# Altium PCB Jade_v1_board.PcbDoc (part 1 of 2)
Units mm, origin at the board's own origin, x right, y up, seen from the top; angles counter-clockwise.
Board outline 20 x 55.5 mm, 4 copper layers (Top Layer, Layer 1, Layer 2, Bottom Layer), stack 0.547 mm thick; 95 components, 80 nets, 388 pads, 387 vias.
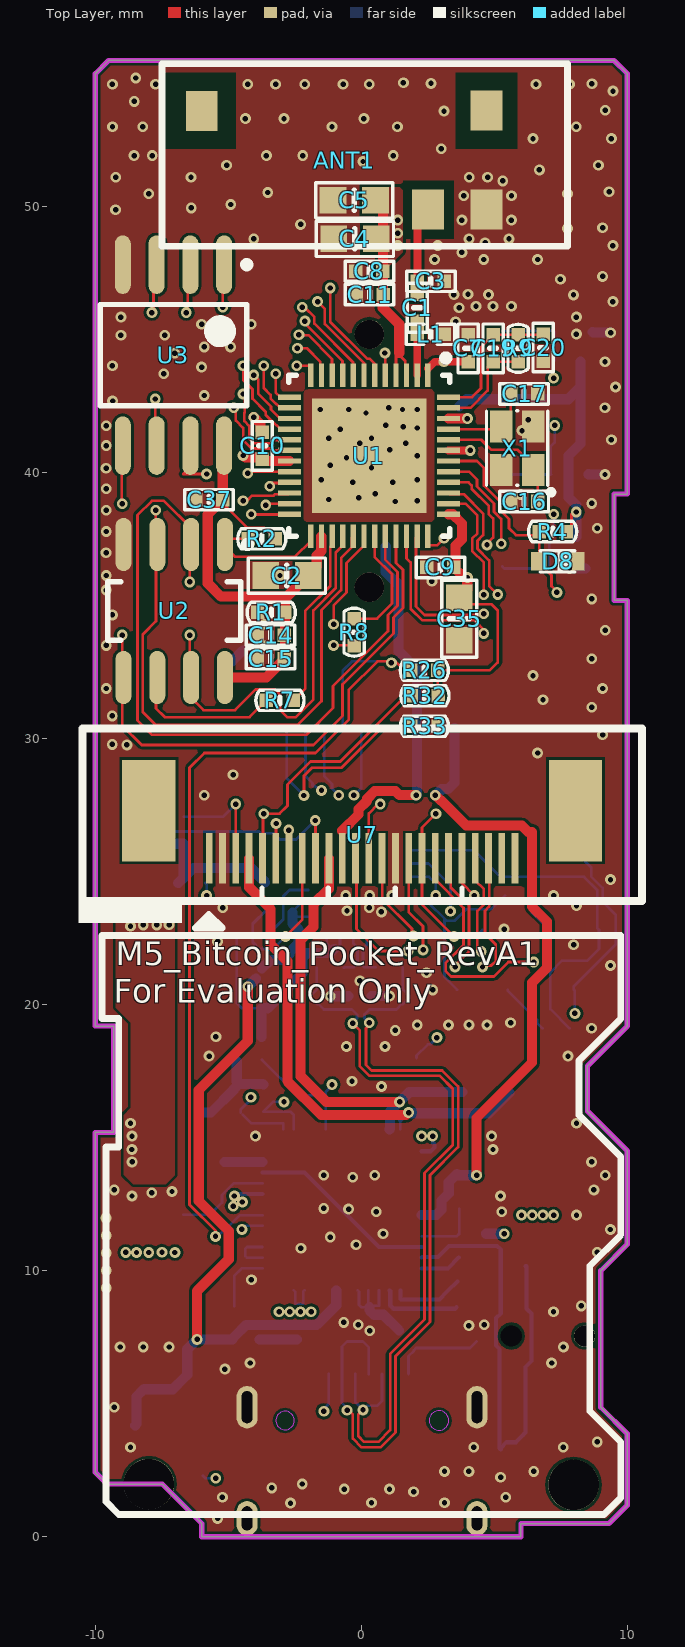
[diagram p0: Top Layer view]
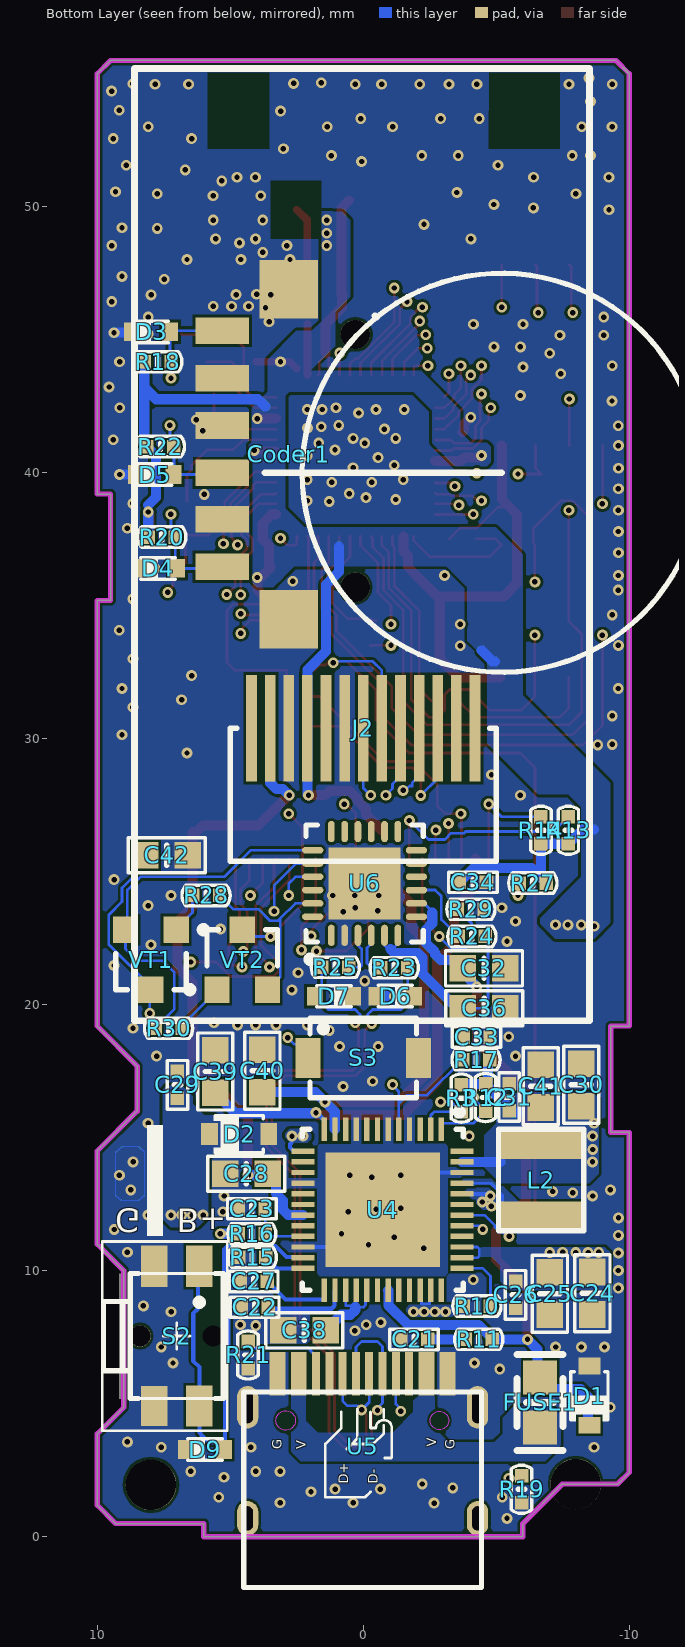
[diagram p1: Bottom Layer view, seen from below]
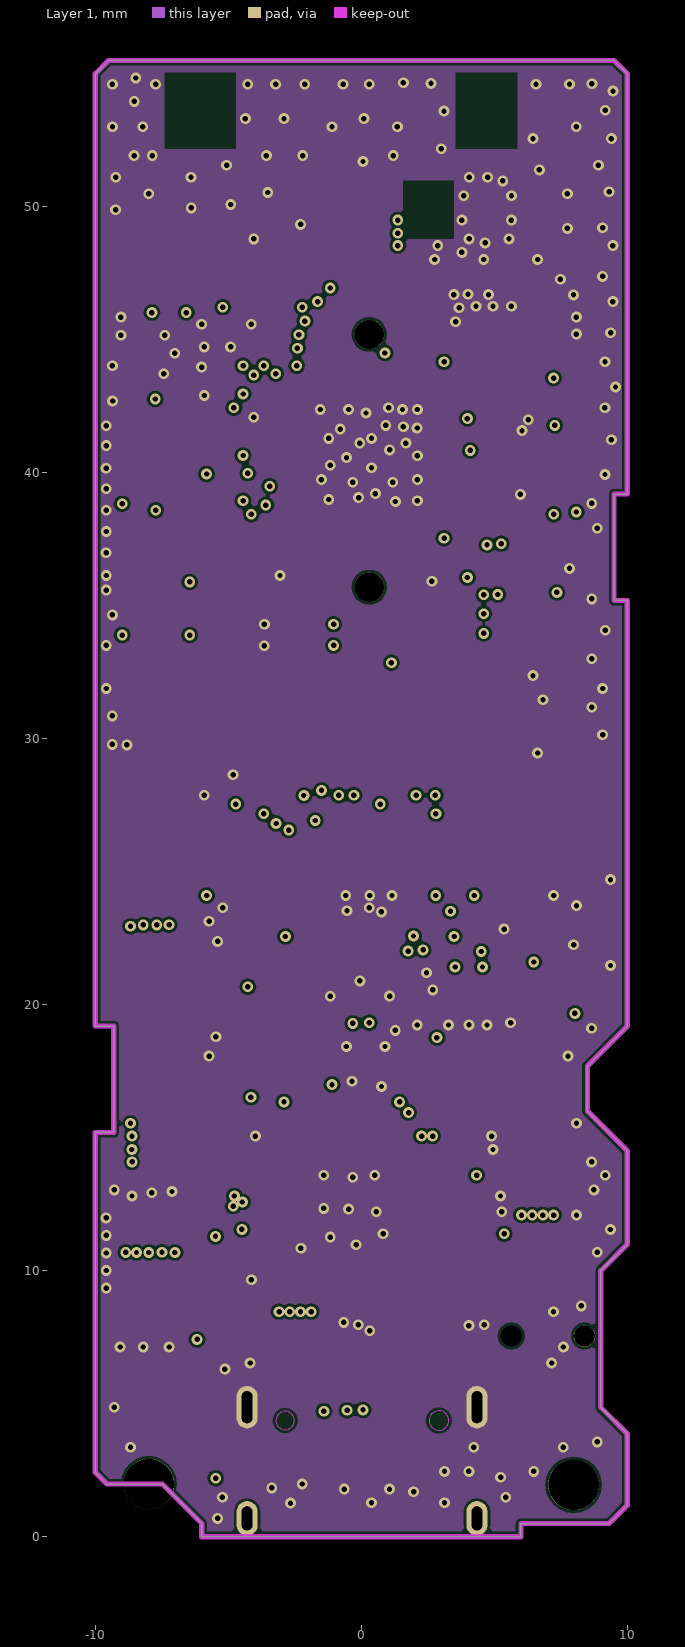
[diagram p2: Layer 1]
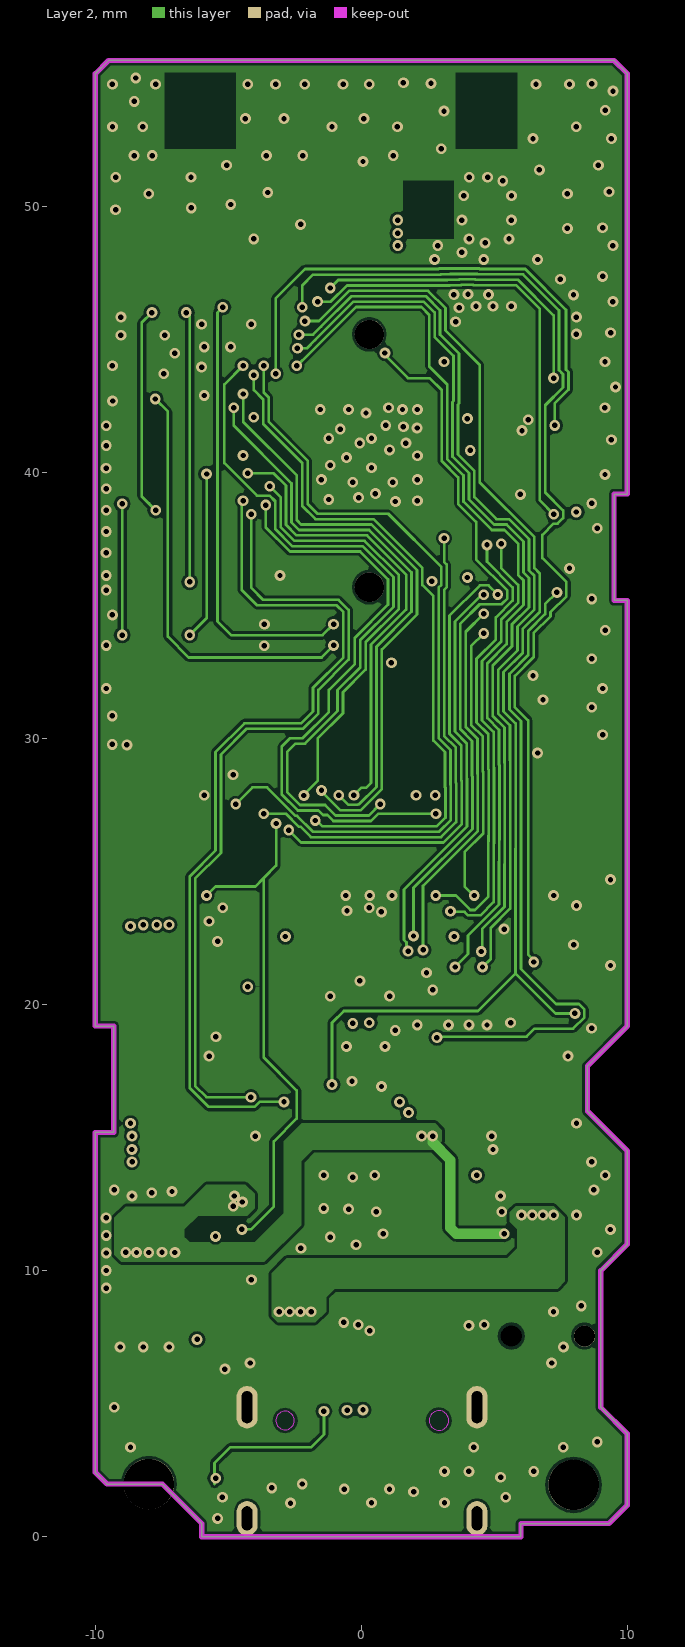
[diagram p3: Layer 2]
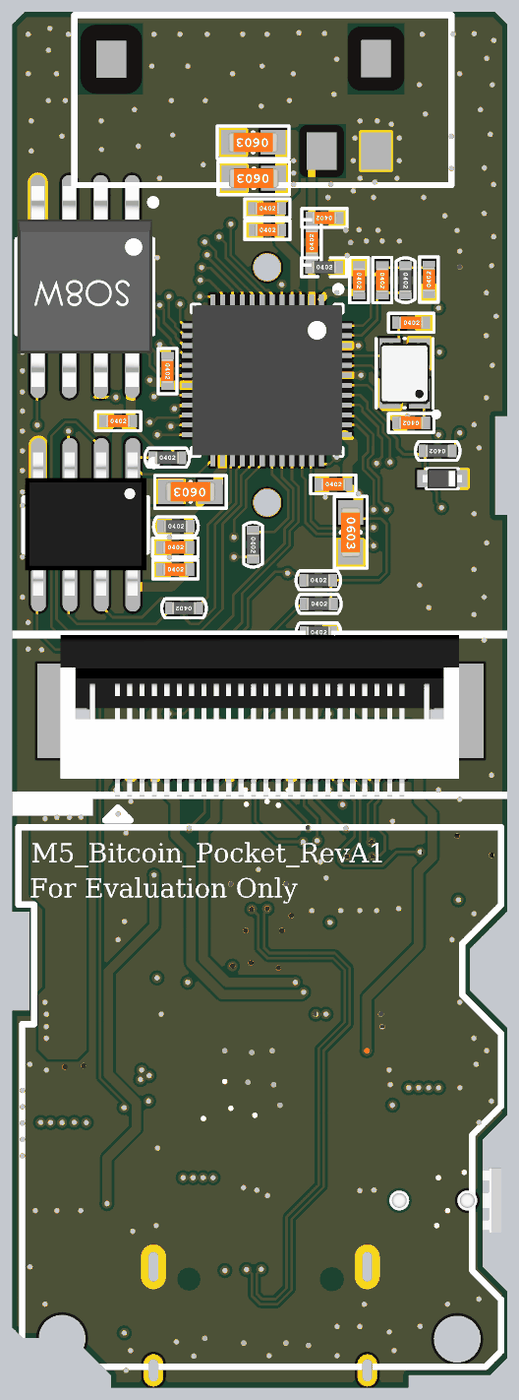
[diagram p5: 3D render of the assembled board from above, using the file's embedded part models]
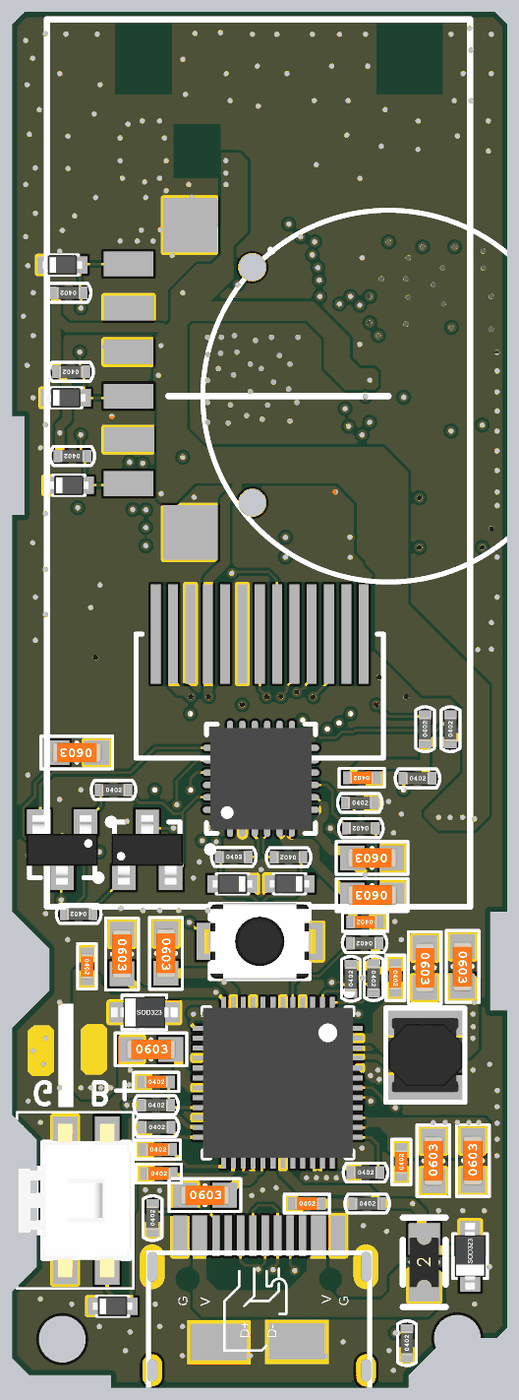
[diagram p6: 3D render of the assembled board from below, using the file's embedded part models]

## Layer stack, top to bottom
Top Solder: solder mask 0.0102, Solder Resist, Dk 3.5
Top Layer: signal copper 0.0175
Dielectric 1: prepreg 0.0711, PP-006, Dk 4.1
Layer 1: signal copper 0.035
Dielectric1: core 0.3, FR-4, Dk 4.2
Layer 2: signal copper 0.035
Dielectric 2: prepreg 0.0711, PP-006, Dk 4.1
Bottom Layer: signal copper 0.0175
Bottom Solder: solder mask 0.0102, Solder Resist, Dk 3.5

## Board outline
-10,2.421 -10,15.2 -9.308,15.2 -9.308,19.2 -10,19.2 -10,26.5 -10,33.685 -10,33.686 -10,39.2 -10,55 -9.5,55.5 9.5,55.5 10,55 10,39.2 9.5,39.2 9.5,35.2 10,35.2 10,19.2 8.5,17.7 8.5,16 10,14.5 10,11 9,10 9,4.872 10,3.872 10,1.192 9.308,0.5 6,0.5 6,0 -6,0 -6,0.5 -7.484,1.984 -9.564,1.984

## Design rules (kind name [scope] priority, off if disabled: settings)
Clearance [All] p1: gap=0.102 ignorepadtopadclearanceinfootprint=FALSE
PlaneConnect [All] p1: planeconnectstyle=Direct reliefexpansion=0.508 reliefentries=4 reliefconductorwidth=0.254 reliefairgap=0.254
PolygonConnect [All] p1: connectstyle=Direct reliefconductorwidth=0.254 reliefentries=4 polygonreliefangle="90 Angle" airgapwidth=0.254
RoutingVias [All] p1: holewidth=0.711 width=1.27 viastyle="Through Hole" minholewidth=0.711 minwidth=1.27 maxholewidth=0.711 maxwidth=1.27 useviatemplates=TRUE viatemplateguid#1={CE86EDF2-7839-4774-B2BF-8AF0CC469DD2} viatemplatename#1=v41h20m0mx0
SolderMaskExpansion [All] p1: expansion=0.102
Width [All] p1: maxlimit=0.889 minlimit=0.102 preferedwidth=0.381 minimp=50.000000 maximp=50.000000 favimp=50.000000
29 further rules are at their usual default settings.

## Classes and differential pairs
component class PG4_AUX_PARTS: C32 C33 C34 C35 C36 D3 D4 D5 D6 D7 D8 D9 FUSE1 J2 R4 R18 R19 R20 R21 R22 R23 R24 R25 R26 R28 R29 R30 R32 S2 S3 U5 U6 U7 VT1 VT2
component class PG3_PMIC_AXP192: C21 C22 C23 C24 C25 C26 C27 C28 C29 C30 C31 C38 C39 C40 D1 D2 L2 R10 R11 R12 R13 R14 R15 R16 R17 U4
component class PG2_ESP32_SUBSYS: ANT1 C1 C2 C3 C4 C5 C7 C8 C9 C10 C11 C14 C15 C16 C17 C19 C20 C37 L1 R1 R2 R3 R7 R9 U1 U2 U3 X1

## Components (designator, comment, footprint, x,y, rotation, side; value= is the part's Value field where it differs from the comment)
ANT1 "Antenna" PRO-ANT-440 -0.381,51.308 r270 top locked
C1 "TBD" SMT_C_0402 2.103,46.203 r90 top
C2 "10uF/6.3V" SMT_C_0603 -2.797,36.136 r180 top
C3 "TBD" SMT_C_0402 2.616,47.193 r180 top
C4 "10uF/6.3V" SMT_C_0603 -0.241,48.79 r180 top
C5 "10uF/6.3V" SMT_C_0603 -0.267,50.238 r180 top
C7 "100pF" SMT_C_0402 4.013,44.679 r270 top
C8 "1uF" SMT_C_0402 0.303,47.574 r0 top
C9 "100nF" SMT_C_0402 2.972,36.44 r0 top
C10 "1uF" SMT_C_0402 -3.726,41.012 r270 top
C11 "100nF" SMT_C_0402 0.309,46.698 r0 top
C14 "1uF" SMT_C_0402 -3.412,33.896 r0 top
C15 "100nF" SMT_C_0402 -3.409,33.007 r0 top
C16 "22pF" SMT_C_0402 6.121,38.919 r180 top
C17 "22pF" SMT_C_0402 6.121,42.961 r0 top
C19 "3.3nF" SMT_C_0402 4.953,44.679 r270 top
C20 "10nF" SMT_C_0402 6.833,44.704 r90 top
C21 "10uF" SMT_C_0402 -1.908,7.42 r180 bottom
C22 "1uF" SMT_C_0402 4.084,8.631 r180 bottom
C23 "1uF" SMT_C_0402 4.188,12.331 r180 bottom
C24 "10uF/6.3V" SMT_C_0603 -8.615,9.156 r90 bottom
C25 "10uF/6.3V" SMT_C_0603 -7.015,9.143 r90 bottom
C26 "1uF" SMT_C_0402 -5.723,9.099 r90 bottom
C27 "1uF" SMT_C_0402 4.118,9.601 r180 bottom
C28 "10uF/6.3V" SMT_C_0603 4.394,13.644 r180 bottom
C29 "10uF" SMT_C_0402 6.983,16.993 r270 bottom
C30 "10uF/6.3V" SMT_C_0603 -8.196,16.99 r270 bottom
C31 "1nF" SMT_C_0402 -5.482,16.53 r270 bottom
C32 "10uF/6.3V" SMT_C_0603 -4.539,21.369 r0 bottom
C33 "100nF" SMT_C_0402 -4.259,18.783 r0 bottom
C34 "1uF" SMT_C_0402 -4.125,24.602 r0 bottom
C35 "10uF/6.3V" SMT_C_0603 3.677,34.506 r270 top
C36 "10uF/6.3V" SMT_C_0603 -4.544,19.871 r0 bottom
C37 "0.1uF" SMT_C_0402 -5.725,38.991 r0 top
C38 "10uF/6.3V" SMT_C_0603 2.215,7.76 r180 bottom
C39 "10uF/6.3V" SMT_C_0603 5.567,17.491 r270 bottom
C40 "10uF/6.3V" SMT_C_0603 3.791,17.517 r270 bottom
C41 "10uF/6.3V" SMT_C_0603 -6.672,16.939 r270 bottom
C42 "10uF/6.3V" SMT_C_0603 7.391,25.619 r0 bottom (schematic designator C36)
Coder1 "Header 5" CODER_1 -5.2,40 r270 bottom locked
D1 "LESD3Z5.0CMT1G" SMT_DIODE_SOD_323 -8.501,5.305 r270 bottom
D2 "LESD3Z5.0CMT1G" SMT_DIODE_SOD_323 4.665,15.138 r0 bottom
D3 "ESD/3.3V" SMT_DIODE_SOD_523 7.978,45.293 r0 bottom
D4 "ESD/3.3V" SMT_DIODE_SOD_523 7.716,36.403 r0 bottom
D5 "ESD/3.3V" SMT_DIODE_SOD_523 7.84,39.934 r0 bottom
D6 "ESD/3.3V" SMT_DIODE_SOD_523 -1.202,20.327 r180 bottom
D7 "ESD/3.3V" SMT_DIODE_SOD_523 1.1,20.322 r180 bottom
D8 "ESD/3.3V" SMT_DIODE_SOD_523 7.38,36.671 r0 top
D9 "ESD/3.3V" SMT_DIODE_SOD_523 5.95,3.282 r0 bottom
FUSE1 "2A" SMT_FUSE_0805 -6.648,5.053 r90 bottom
J2 "ZJY_IPS_1_14_LCD" ZJY_1.3_HZ_13Pin 0,27 r270 bottom locked
L1 "TBD" SMT_L_0402 2.603,45.2 r0 top
L2 "2.2uH/3015/WPN" SMT_L_3.0mm -6.686,13.412 r270 bottom
R1 "2K" SMT_R_0402 -3.388,34.749 r0 top
R2 "10K" SMT_R_0402 -3.74,37.516 r0 top
R3 "DNW" SMT_R_0402 -3.685,16.491 r90 bottom
R4 "10K" SMT_R_0402 7.192,37.79 r180 top
R7 "200R" SMT_R_0402 -3.061,31.442 r180 top
R8 "200R" SMT_R_0402 -0.27,34.006 r270 top
R9 "20K" SMT_R_0402 5.893,44.679 r270 top
R10 "10K/1%/TS" SMT_R_0402 -4.275,8.674 r180 bottom locked
R11 "4.7R" SMT_R_0402 -4.342,7.423 r180 bottom
R12 "DNW" SMT_R_0402 -4.596,16.514 r270 bottom
R13 "10K" SMT_R_0402 -7.709,26.56 r90 bottom
R14 "10K" SMT_R_0402 -6.681,26.56 r90 bottom
R15 "200K" SMT_R_0402 4.169,10.503 r180 bottom
R16 "0R" SMT_R_0402 4.188,11.392 r180 bottom
R17 "10K" SMT_R_0402 -4.24,17.929 r0 bottom
R18 "10K" SMT_R_0402 7.724,44.171 r0 bottom
R19 "5.1K" SMT_R_0402 -5.949,1.788 r90 bottom
R20 "10K" SMT_R_0402 7.572,37.584 r0 bottom
R21 "5.1K" SMT_R_0402 4.331,6.836 r90 bottom
R22 "10K" SMT_R_0402 7.623,40.985 r0 bottom
R23 "22R" SMT_R_0402 -1.164,21.395 r0 bottom
R24 "10K" SMT_R_0402 -4.085,22.568 r0 bottom
R25 "22R" SMT_R_0402 1.049,21.409 r180 bottom
R26 "10K" SMT_R_0402 2.366,32.571 r0 top
R27 "10K" SMT_R_0402 -6.376,24.577 r180 bottom (schematic designator R26)
R28 "10K" SMT_R_0402 5.91,24.109 r180 bottom
R29 "10K" SMT_R_0402 -4.048,23.589 r180 bottom
R30 "10K" SMT_R_0402 7.318,19.114 r0 bottom
R32 "10K" SMT_R_0402 2.39,31.616 r0 top
R33 "10K" SMT_R_0402 2.374,30.468 r0 top (schematic designator R32)
S2 "SMT_SW_TS_015" SMT_SW_TS_015 7.014,7.547 r270 bottom
S3 "SMT_SW_PTS_820" SMT_SW_PTS_820 0,18 r180 bottom locked
U1 "ESP32" PQFN40P600X600X90_HS-49N 0.3,40.64 r270 top locked
U2 "EspPSRAM" SOP-8 -7.036,34.806 r270 top
U3 "W25Qxx" WSOP-8 -7.063,44.422 r270 top
U4 "AXP192" PQFN40P600X600X90_HS-49N -0.737,12.294 r270 bottom locked
U5 "USB_Micro" M5-USB-TC-2 0.051,2.794 r90 top locked
U6 "CP2104" QFN50P401X400X90_HS-25N -0.05,24.562 r90 bottom
U7 "OV-Camera" FPC0.5-SMT-24P-B-DRAWER -5.72,25.5 r0 top locked
VT1 "NPN-S8050-贴片" NPN-S8050-贴片 7.984,21.696 r0 bottom
VT2 "NPN-S8050-贴片" NPN-S8050-贴片 4.549,21.693 r180 bottom
X1 "40Mhz/+-10ppm/22pF" SMT_XTAL_2520 5.857,40.919 r90 top

## Footprints (in the part's own frame and the unit in brackets; to place one, negate y for a bottom-side part, rotate by r counter-clockwise, add the part's x,y. Pads: shape width x height; smd on the part's side, far side on the other; paste and mask are expansions set on the pad)
CODER_1 [mm]
  round 1.1 hole 1.1: 0(-5.2,-5.5) ""(4.3,-5.5)
  rect 1x2 smd: 1(-5.334,-10.5) 2(-3.556,-10.5) 3(-1.778,-10.5) 4(0,-10.5) 5(1.75,-10.5) 6(3.528,-10.5)
  rect 2.2x2.2 smd: 7(-6.9,-8) 8(5.5,-8)
  silkscreen extent -7.5,-8.89 7.5,7.5
FPC0.5-SMT-24P-B-DRAWER [mm]
  rect 0.254x1.9 smd: 1(0,0) 2(0.5,0) 3(1,0) 4(1.5,0) 5(2,0) 6(2.5,0) 7(3,0) 8(3.5,0) 9(4,0) 10(4.5,0) 11(5,0) 12(5.5,0) 13(6,0) 14(6.5,0) 15(7,0) 16(7.5,0) 17(8,0) 18(8.5,0) 19(9,0) 20(9.5,0) 21(10,0) 22(10.5,0) 23(11,0) 24(11.5,0)
  rect 2x3.81 smd: 25(13.77,1.8) 26(-2.27,1.8)
  silkscreen extent -4.92,-2.61 16.28,4.88, body extent -2.33,-1.64 13.76,4.85, height 2.2
M5-USB-TC-2 [mm]
  oval 1.3x0.8 hole 0.4 slot 0.9 at 0 deg: 0(-2.102,4.345) 0(-2.102,-4.295)
  rect 1.64x0.6 smd far side: 1(3.33,3.225) 2(3.33,2.425) 11(3.33,-2.375) 12(3.33,-3.175)
  rect 1.64x0.3 smd far side: 3(3.33,1.775) 4(3.33,1.275) 5(3.33,0.775) 6(3.33,0.275) 7(3.33,-0.225) 8(3.33,-0.725) 9(3.33,-1.225) 10(3.33,-1.725)
  oval 1.6x0.8 hole 0.4 slot 1.2 at 0 deg: TH1(2.078,4.345) TH2(2.078,-4.295)
  Keep-Out Layer circle w0.025: c1.578,-2.865 r0.367
  Keep-Out Layer circle w0.025: c1.578,2.915 r0.347
NPN-S8050-贴片 [mm] "NPN-S8050-贴片"
  rect 0.95x1 smd: 1(-0.95,-1.125) 2(0.95,-1.125) 3(0,1.125)
  silkscreen extent -2.1,-1.25 1.32,1.13, body extent -1.45,-1.4 1.45,1.4, height 1.3
PQFN40P600X600X90_HS-49N [mm] "PQFN, 48-Leads, Body 6.00x6.00mm, Pitch 0.40mm, Thermal Pad 4.30x4.30mm, IPC Medium Density"
  rect 0.875x0.2 smd: 1(-3.029,2.2) 2(-3.029,1.8) 3(-3.029,1.4) 4(-3.029,1) 5(-3.029,0.6) 6(-3.029,0.2) 7(-3.029,-0.2) 8(-3.029,-0.6) 9(-3.029,-1) 10(-3.029,-1.4) 11(-3.029,-1.8) 12(-3.029,-2.2) 25(3.029,-2.2) 26(3.029,-1.8) 27(3.029,-1.4) 28(3.029,-1) 29(3.029,-0.6) 30(3.029,-0.2) 31(3.029,0.2) 32(3.029,0.6) 33(3.029,1) 34(3.029,1.4) 35(3.029,1.8) 36(3.029,2.2)
  rect 0.2x0.875 smd: 13(-2.2,-3.004) 14(-1.8,-3.004) 15(-1.4,-3.004) 16(-1,-3.004) 17(-0.6,-3.004) 18(-0.2,-3.004) 19(0.2,-3.004) 20(0.6,-3.004) 21(1,-3.004) 22(1.4,-3.004) 23(1.8,-3.004) 24(2.2,-3.004) 37(2.2,2.979) 38(1.8,2.979) 39(1.4,2.979) 40(1,2.979) 41(0.6,2.979) 42(0.2,2.979) 43(-0.2,2.979) 44(-0.6,2.979) 45(-1,2.979) 46(-1.4,2.979) 47(-1.8,2.979) 48(-2.2,2.979)
  rect 4.3x4.3 smd: 49(0,0)
  silkscreen extent -3.8,-3.03 3.03,3.03, body extent -3.03,-3.03 3.03,3.03, height 0.9
PRO-ANT-440 [mm]
  rect 1.5x1.2 smd: 1(1.419,5.08)
  rect 1.5x1.2 smd mask+0.3: 2(1.419,2.88)
  rect 1.5x1.2 smd mask+0.55: 3(-2.311,5.08)
  rect 1.5x1.2 smd mask+0.65: 4(-2.286,-5.62)
  silkscreen extent -4.06,-7.11 2.79,8.13, body extent -3.2,-6.1 2.03,7.62, height 3.53
QFN50P401X400X90_HS-25N [mm] "QFN, 24-Leads, Body 4.01x4.00mm, Pitch 0.50mm, Thermal Pad 2.70x2.70mm, IPC Medium Density"
  oval 0.8x0.25 smd: 1(-1.95,1.25) 2(-1.95,0.75) 3(-1.95,0.25) 4(-1.95,-0.25) 5(-1.95,-0.75) 6(-1.95,-1.25) 13(1.95,-1.25) 14(1.95,-0.75) 15(1.95,-0.25) 16(1.95,0.25) 17(1.95,0.75) 18(1.95,1.25)
  oval 0.25x0.8 smd: 7(-1.25,-1.95) 8(-0.75,-1.95) 9(-0.25,-1.95) 10(0.25,-1.95) 11(0.75,-1.95) 12(1.25,-1.95) 19(1.25,1.95) 20(0.75,1.95) 21(0.25,1.95) 22(-0.25,1.95) 23(-0.75,1.95) 24(-1.25,1.95)
  rect 2.7x2.7 smd: 25(0,0)
  silkscreen extent -2.97,-2.2 2.2,2.2, body extent -2.05,-2.05 2.05,2.05, height 0.9
SMT_C_0402 [mil] "Surface mount capacitor 0402"
  rect 20x20 smd: 1(-20,0) 2(20,0)
  silkscreen extent -36,-15 36,15, body extent -20,-10 20,10, height 20
SMT_C_0603 [mm] "Surface mount capacitor 0603"
  rect 1x1 smd: 1(-0.8,0) 2(0.8,0)
  silkscreen extent -1.45,-0.66 1.45,0.66, body extent -1,-0.39 1,0.39, height 0.79
SMT_DIODE_SOD_323 [mm] "SOD-323(0805) Package"
  rect 0.63x0.83 smd: 1(-1.115,0) 2(1.115,0)
  silkscreen extent -0.9,-0.7 0.96,0.7, body extent -1.35,-0.62 1.35,0.63, height 1.1
SMT_DIODE_SOD_523 [mm] "SOD-523(0603) Package"
  rect 0.6x0.7 smd: 1(-0.71,0) 2(0.71,0)
  silkscreen extent -0.65,-0.4 0.65,0.4, body extent -0.8,-0.4 0.8,0.4, height 0.7
SMT_FUSE_0805 [mil] "Surface mount FUSE 0805"
  rect 50x50 smd: 1(-37,0) 2(37,0)
  silkscreen extent -71,-34 71,34, body extent -39,-24 39,24, height 19
SMT_L_3.0mm [mm] "SMT Power Inductor, 3.0x3.0x1mm"
  rect 1x3 smd: 1(-1.3,0) 2(1.3,0)
  silkscreen extent -1.91,-1.6 1.91,1.6, body extent -1.5,-1.5 1.5,1.5, height 1.04
SMT_L_0402 [mil] "Surface mount inductor 0402"
  rect 20x20 smd: 1(-20,0) 2(20,0)
  silkscreen extent -36,-15 36,15, body extent -20,-10 20,10, height 20
SMT_R_0402 [mil] "Surface mount resistor 0402"
  rect 20x20 smd: 1(-20,0) 2(20,0)
  silkscreen extent -36,-15 36,15, body extent -20,-10 20,10, height 20
SMT_SW_PTS_820 [mm] "SMT Tactile ?Switch PTS 820 Series"
  rect 0.95x1.5 smd: 1(-2.075,0) 2(2.075,0)
  silkscreen extent -2,-1.5 2,1.5, body extent -2.25,-1.55 2.25,1.55, height 2.05
SMT_SW_TS_015 [mm] "SMT Switch TS-015"
  rect 1.55x1 smd: 1(-2.625,0.85) 2(2.625,0.85) 3(-2.625,-0.85)
  rect 1.5x1 smd: 4(2.625,-0.85)
  round 0.4 hole 0.8 unplated: MH1(0,1.375)
  round 0.8 hole 0.8 unplated: MH2(0,-1.375)
  silkscreen extent -3.56,-2.8 3.56,1.91, body extent -3.1,-2.75 3.1,1.8, height 1.65
SMT_XTAL_2520 [mm] "Quartz Crystal, SM; Body 2.5 x 2.0 mm"
  rect 1.2x0.85 smd: 1(-0.813,-0.6) 2(0.813,-0.6) 3(0.813,0.6) 4(-0.813,0.6)
  silkscreen extent -1.75,-1.37 1.41,1.15, body extent -1.25,-1 1.25,1, height 0.79
SOP-8 [mm] "8-Pin Small Outline Integrated Circuit 1.27 mm Pitch, IPC Low Density"
  oval 2x0.6 smd: 1(-2.5,1.905) 2(-2.5,0.635) 3(-2.5,-0.635) 4(-2.5,-1.905) 5(2.5,-1.905) 6(2.5,-0.635) 7(2.5,0.635) 8(2.5,1.905)
  silkscreen extent -2.62,-2.5 1.1,2.88, body extent -2.92,-2.45 2.86,2.45, height 1.45
WSOP-8 [mm] "8-Pin Small Outline Package 1.27 mm Pitch, IPC Medium Density"
  oval 2.2x0.6 smd: 1(-3.4,1.905) 2(-3.4,0.635) 3(-3.4,-0.635) 4(-3.4,-1.905) 5(3.4,-1.905) 6(3.4,-0.635) 7(3.4,0.635) 8(3.4,1.905)
  silkscreen extent -3.52,-2.75 1.9,2.88, body extent -4.05,-2.73 4.05,2.73, height 1.75
ZJY_1.3_HZ_13Pin [mm]
  rect 4x0.4 smd: 1(-3.4,-4.2) 2(-3.4,-3.5) 3(-3.4,-2.8) 4(-3.4,-2.1) 5(-3.4,-1.4) 6(-3.4,-0.7) 7(-3.4,0) 8(-3.4,0.7) 9(-3.4,1.4) 10(-3.4,2.1) 11(-3.4,2.8) 12(-3.4,3.5) 13(-3.4,4.2)
  silkscreen extent -28.2,-8.6 7.6,8.5, body extent -28.2,-8.6 7.6,8.5, height 3.4

## Part data
ANT1: "Generic Antenna"
C1 C3 C7 C8 C9 C10 C11 C14 C15 C16 C17 C19 C20 C21 C22 C23 C26 C27 C29 C31 C33 C34 C37: library part SMT_C_0402, "Surface mount capacitor 0402"
C2 C4 C5 C24 C25 C28 C30 C32 C35 C36 C38 C39 C40 C41 C42: library part SMT_C_0603, "Surface mount capacitor 0603"
Coder1: "Header, 5-Pin"
D1 D2 D3 D4 D5 D6 D7 D8 D9: library part SMT_DIODE_TVS_B_SOD_523, "Surface mount bidirectional TVS diode SOD-523(0603) Package"
FUSE1: library part SMT_FUSE_1812, "SMT_FUSE_1812"
L1: library part SMT_L_0402, "Surface mount inductor 0402"
L2: library part SMT_L_3.0mm, "SMT Power Inductor, 3.3x3.3x1mm"
R1 R2 R3 R4 R7 R8 R9 R10 R11 R12 R13 R14 R15 R16 R17 R18 R19 R20 R21 R22 R24 R26 R27 R28 R29 R30 R32 R33: library part SMT_R_0402, "Surface mount resistor 0402"
R23 R25: library part SMT_R_0603, "Surface mount resistor 0603"
S3: "SMT Tactile ?Switch PTS 820 Series"
U1: "ESP32 is designed for mobile, wearable electronics, and Internet of Things (IoT) applications. It has many features  of the state-of-the-art low power chips, including fine resolution clock gating, power modes, and dynamic power  scaling."
U3: library part W25QXX, "Serial flash memory with dual and quad SPI"
U5: "USB micro female"
U6: "单芯片USB转UART桥接器"
U7: "OV9650/OV2460/OV3640/OV5640"
X1: library part SMT_XTAL_PASSIVE, "Passive crystal"

## Free pads (board coordinates)
  round 1.9 hole 1.9 unplated: 0(-7.987,1.984) 0(7.981,1.953)

## Via types
v1: diameter 0.406, hole 0.203, Top Layer to Bottom Layer, tented both sides, 387 vias

## Nets (pads, with @x,y where several pads share a name; then routed paths per layer and width w, separated by ;. In a path a pad name is that pad's centre, name@x,y a point inside that pad or via, vN(x,y) a via of type N, cw(c..) or ccw(c..) an arc to the next point about the centre after c; other vN are vias at no path point)
AXP_CAM_RST: R27.1 U4.41 U7.6 | length 22.1
  Top Layer w0.102: U7.6@-3.22,25.5 -3.212,25.507 -3.212,26.807 v1(-3.205,26.815)
  Layer 2 w0.102: v1(-5.817,24.109) -5.476,24.45 -3.983,24.45 -3.67,24.763 ; v1(-4.491,11.554) -4.479,11.567 -4.135,11.567 -3.29,12.412 -3.29,14.868 -2.431,15.727 -2.431,16.774 -3.67,18.013 -3.67,24.763 ; v1(-3.205,26.815) -3.205,25.228 -3.67,24.763
  Bottom Layer w0.102: R27.1@-5.868,24.577 -5.817,24.526 v1(-5.817,24.109) ; v1(-4.491,11.554) -4.491,11.634 -4.431,11.694 U4.41@-3.715,11.694
AXP_DISP_RST: J2.8 R26.1 U4.42 | length 34.9
  Top Layer w0.102: v1(-5.482,11.294) -5.482,11.509 -6.457,12.484 -6.457,28.91 -5.903,29.464 -1.727,29.464 -0.478,30.713 -0.478,31.828 0.605,32.911 v1@1.128,32.911 ; v1@1.282,32.911 1.419,32.774 1.655,32.774 R26.1@1.858,32.571
  Bottom Layer w0.102: v1(-5.482,11.294) -5.4,11.294 -5.234,11.459 -5.123,11.459 -4.952,11.631 -4.952,11.701 -4.559,12.094 U4.42@-3.715,12.094 ; J2.8@-0.7,30.4 -0.7,32.567 -0.356,32.911 1.074,32.911 v1(1.128,32.857)
CP_DTR: R28.2 U6.23 VT2.2 | length 7
  Bottom Layer w0.102: U6.23@1.9,23.812 2.55,23.812 3.125,23.237 ; VT2.2@3.599,20.568 3.125,21.043 3.125,23.237 ; R28.2@5.402,24.109 4.882,23.589 3.927,23.589 3.498,23.16 3.202,23.16 3.125,23.237
CP_RTS: R30.2 U6.19 VT1.2 | length 14.4
  Bottom Layer w0.102: U6.19@1.9,25.812 4.224,25.812 5.224,24.812 8.368,24.812 8.868,24.312 8.868,22.887 VT1.2@8.934,22.821 8.934,22.099 8.494,21.659 7.541,21.659 7.103,21.22 7.103,19.837 R30.2@7.826,19.114
ESP32_RST: C42.2 R17.2 U1.9 U4.5 VT1.3 | length 60.8
  Top Layer w0.102: v1(-2.123,45.702) -2.123,45.616 -0.712,44.204 -0.712,43.681 U1.9@-0.7,43.669
  Layer 2 w0.102: v1(-2.123,45.702) -1.594,45.702 -0.457,46.839 2.512,46.839 3.162,46.189 3.162,45.347 4.451,44.057 4.451,39.638 6.502,37.587 6.502,36.415 6.706,36.212 6.706,34.772 6.071,34.137 6.071,33.233 5.347,32.509 5.347,31.031 5.801,30.576 5.801,25.879 5.797,25.875 5.797,21.179 ; v1(-1.103,16.999) -1.103,19.324 -0.659,19.769 4.388,19.769 5.797,21.179 ; v1(8.026,19.675) 7.301,19.675 5.797,21.179
  Bottom Layer w0.102: R17.2@-3.732,17.929 -2.404,16.601 -1.65,16.601 -1.337,16.288 ; U4.5@-1.337,15.323 -1.337,16.288 ; v1@-1.041,17.021 -1.082,17.021 v1(-1.103,16.999) -1.103,16.963 -1.337,16.73 -1.337,16.288 ; v1(8.026,19.675) 8.026,20.529 VT1.3@7.984,20.571 7.984,20.68 9.562,22.258 9.562,23.384 9.072,23.874 9.072,24.396 8.64,24.827 8.64,25.169 C42.2@8.191,25.619
ESP_CAP1: C19.1 C20.2 R9.1 U1.48 | length 5.4
  Top Layer w0.102: U1.48@3.279,42.84 4.16,42.84 4.496,43.176 4.496,44.729 C19.1@4.953,45.187 6.807,45.187 C20.2@6.833,45.212
ESP_CAP2: C19.2 R9.2 U1.47 | length 3.8
  Top Layer w0.102: U1.47@3.279,42.44 4.096,42.44 4.75,43.094 4.75,43.967 C19.2@4.953,44.171 R9.2@5.893,44.171
ESP_LNA: C1.1 L1.1 U1.2 | length 1.9
  Top Layer w0.293: U1.2@2.1,43.669 C1.1@2.1,45.594
ESP_XTAL_N: C16.1 U1.44 X1.1 | length 5
  Top Layer w0.102: U1.44@3.279,41.24 4.508,41.24 4.889,40.859 5.879,40.859 6.457,40.282 X1.1@6.457,40.107 6.629,39.934 C16.1@6.629,38.919
ESP_XTAL_P: C17.1 U1.45 X1.3 | length 3.4
  Top Layer w0.102: U1.45@3.279,41.64 5.165,41.64 X1.3@5.257,41.732 5.613,42.088 C17.1@5.613,42.961
GND: ANT1.1 C2.2 C3.1 C4.2 C5.2 C7.1 C8.1 C9.1 C10.1 C11.1 C14.1 C15.1 C16.2 C17.2 C20.1 C21.1 C22.1 C23.1 C24.1 C25.1 C26.1 C27.1 C28.1 C29.1 C30.1 C31.1 C32.1 C33.1 C34.1 C35.2 C36.1 C37.1 C38.1 C39.1 C40.1 C41.1 C42.1 Coder1.2 Coder1.3 Coder1.5 Coder1.7 Coder1.8 D1.1 D2.1 D3.2 D4.2 D5.2 D6.1 D7.2 D8.2 D9.2 J2.3 J2.6 L1.2 R1.1 R10.1 R15.1 R19.1 R21.1 R29.2 R33.2 S2.3 S2.4 S3.2 U1.49 U2.4 U3.4 U4.4 U4.6 U4.9 U4.16 U4.22 U4.46 U4.49 U5.1 U5.12 U5.TH1 U5.TH2 U6.2 U6.25 U7.2 U7.15 X1.2 X1.4 | length 11.1
  Top Layer w0.381: v1(-4.043,42.088) -3.79,41.835 -3.79,41.584 C10.1@-3.726,41.52
  Bottom Layer w0.152: U4.46@-3.715,13.694 -2.137,13.694 U4.49@-0.737,12.294 0.663,10.894 U4.22@2.267,10.894
  Bottom Layer w0.381: v1(-1.168,20.322) -0.498,20.322 D6.1@-0.492,20.327 ; D7.2@0.39,20.322 0.393,20.324 1.061,20.324 v1(1.063,20.327) ; v1(7.826,36.403) D4.2@8.426,36.403 ; D5.2@8.535,39.949 D5.2@8.55,39.934 v1(9.16,39.934) ; D3.2@8.688,45.293 8.714,45.268 9.365,45.268 v1(9.37,45.263)
  other v1: -5.402,0.692 -2.664,1.267 0.382,1.283 3.127,1.283 -5.222,1.491 5.431,1.491 1.966,1.697 -0.645,1.793 1.058,1.793 -3.365,1.839 -2.221,1.984 5.235,2.24 3.124,2.461 4.042,2.461 6.482,2.461 -8.679,3.365 4.223,3.365 7.592,3.365 8.866,3.569 -9.286,4.872 -5.131,6.304 -4.183,6.533 7.153,6.533 -9.07,7.137 -8.2,7.137 -7.229,7.137 7.595,7.137 0.316,7.744 4.044,7.941 -0.115,7.969 4.618,7.97 -0.662,8.059 7.222,8.464 8.265,8.682 -9.591,9.351 -4.133,9.665 -9.591,10.01 -9.591,10.67 8.866,10.698 -2.272,10.851 -0.197,10.983 -1.168,11.266 -9.591,11.329 0.82,11.392 9.362,11.553 -9.594,11.989 8.088,12.094 0.561,12.218 5.278,12.218 -0.478,12.318 -1.415,12.344 -8.62,12.812 5.232,12.812 -7.877,12.936 -7.12,12.982 -9.289,13.043 8.74,13.043 -0.323,13.518 -1.412,13.59 0.503,13.59 9.167,13.59 8.654,14.094 4.95,14.559 -3.983,15.065 4.895,15.065 8.088,15.544 0.756,16.928 -0.352,17.128 -5.722,18.07 7.77,18.07 -0.56,18.433 0.89,18.433 -5.466,18.801 1.275,19.037 8.656,19.119 2.103,19.242 3.276,19.242 4.722,19.242 4.046,19.246 5.611,19.324 2.682,20.561 -0.056,20.899 2.449,21.206 9.365,21.478 7.978,22.257 -5.405,22.381 5.367,22.846 -5.722,23.142 0.755,23.492 -0.539,23.534 -5.211,23.646 0.297,23.646 8.088,23.73 -0.583,24.109 0.316,24.109 1.153,24.109 7.225,24.109 9.368,24.707 -5.905,27.876 -4.821,28.651 6.624,29.464 -8.811,29.769 -9.362,29.789 9.068,30.15 -9.362,30.861 8.659,31.187 6.83,31.468 -9.588,31.891 9.068,31.891 6.454,32.375 8.661,33.007 -9.591,33.51 -3.648,33.498 9.169,34.078 -3.646,34.306 -9.36,34.655 8.664,35.258 -9.588,35.587 2.65,35.924 -9.591,36.136 -3.057,36.136 -9.594,36.996 -9.591,37.79 8.866,37.913 -9.591,38.59 8.664,38.847 1.278,38.918 2.106,38.946 -1.222,38.995 -0.102,39.068 5.977,39.186 0.528,39.215 -9.591,39.399 -0.323,39.64 1.182,39.64 -1.503,39.744 2.106,39.744 -9.594,40.17 0.382,40.186 -1.168,40.282 -0.558,40.568 2.106,40.64 1.061,40.859 -9.591,41.022 -0.058,41.114 1.673,41.114 9.398,41.24 -1.222,41.29 0.382,41.29 6.038,41.584 -0.795,41.64 2.097,41.681 1.58,41.732 -9.588,41.768 0.919,41.778 6.274,41.99 0.174,42.247 -1.543,42.376 -0.48,42.376 1.548,42.376 2.106,42.376 1.023,42.44 9.155,42.44 -9.352,42.697 -5.905,42.902 9.553,43.223 -7.427,43.719 -6.006,43.973 -9.357,44.022 9.158,44.171 -7.013,44.494 -5.905,44.729 -4.915,44.729 -9.041,45.17 -7.394,45.17 8.083,45.212 -6.004,45.583 -4.14,45.583 3.541,45.675 -9.038,45.85 8.085,45.85 3.674,46.199 4.31,46.258 4.95,46.258 5.641,46.258 9.456,46.432 3.478,46.698 4.78,46.695 7.976,46.685 4.011,46.711 7.483,47.272 9.068,47.381 2.755,48.018 4.601,48.018 6.627,48.018 3.78,48.283 2.872,48.539 9.456,48.539 4.653,48.641 -4.046,48.79 4.05,48.79 5.549,48.79 7.747,49.185 9.07,49.21 -2.283,49.337 3.782,49.498 5.641,49.499 -9.238,49.889 -6.395,49.955 -4.912,50.084 3.85,50.411 5.644,50.411 -7.992,50.486 7.744,50.486 -3.518,50.533 9.314,50.564 5.319,50.973 -9.235,51.105 -6.403,51.105 4.053,51.105 4.748,51.105 6.693,51.384 -5.065,51.557 8.913,51.557 0.061,51.702 -8.542,51.923 -7.859,51.923 -3.571,51.923 -2.199,51.923 1.197,51.923 3.002,52.177 6.454,52.563 9.401,52.563 -9.355,53.01 -8.215,53.01 -1.103,53.01 1.356,53.01 8.08,53.01 -4.361,53.315 -2.906,53.315 0.097,53.315 3.108,53.594 9.172,53.63 -8.539,53.96 9.459,54.348 -9.36,54.602 -7.733,54.602 -4.272,54.602 -3.222,54.602 -2.126,54.602 -0.688,54.602 0.297,54.602 6.566,54.607 7.824,54.607 8.666,54.623 2.619,54.638 1.582,54.661 -8.481,54.839
GPIO0: U1.23 U7.17 VT2.3 | length 30
  Top Layer w0.102: v1(-3.594,38.783) -3.54,38.837 -2.707,38.837 U1.23@-2.704,38.84 ; v1@2.8,27.183 2.28,26.663 U7.17@2.28,25.5 2.28,23.774 v1(3.486,22.568)
  Layer 2 w0.102: v1(-3.594,38.783) -3.594,37.947 -2.683,37.036 -0.043,37.036 1.002,35.991 1.002,35.043 -0.244,33.796 -0.244,32.812 -1.222,31.834 -1.222,31.002 -2.205,30.019 -2.679,30.019 -2.992,29.706 -2.992,27.909 -2.39,27.307 -1.61,27.307 -1.435,27.132 -1.272,27.132 -1.051,26.911 0.366,26.911 0.638,27.183 v1(2.804,27.183)
  Bottom Layer w0.102: v1(3.486,22.568) 4.299,22.568 VT2.3@4.549,22.818
GPIO2: R3.1 U1.22 U4.2 | length 37.5
  Top Layer w0.102: v1(-4.445,38.948) -4.302,38.948 -4.111,39.139 -3.299,39.139 -3.248,39.191 -2.753,39.191 U1.22@-2.704,39.24
  Layer 2 w0.102: v1(-4.445,38.948) -4.493,38.901 -4.493,35.582 -3.929,35.019 -0.935,35.019 -0.678,34.762 -0.678,33.059 -1.819,31.918 -1.819,31.031 -2.27,30.58 -4.398,30.58 -5.482,29.496 -5.482,25.798 -6.452,24.828 -6.452,16.866 -5.756,16.17 -4.006,16.17 -3.824,16.351 v1(-2.909,16.351)
  Bottom Layer w0.102: v1(-2.909,16.351) -3.317,16.351 R3.1@-3.685,15.983 -2.673,15.983 -2.537,15.847 U4.2@-2.537,15.323
GPIO4: R12.2 U1.24 U4.1 | length 34.7
  Top Layer w0.102: v1(-4.137,38.44) -4.125,38.428 -2.716,38.428 U1.24@-2.704,38.44
  Layer 2 w0.102: v1(-4.153,16.525) -5.824,16.525 -6.248,16.95 -6.248,24.744 -5.279,25.714 -5.279,29.412 -4.313,30.377 -2.186,30.377 -1.616,30.946 -1.616,31.834 -0.475,32.975 -0.475,34.846 -0.851,35.222 -3.688,35.222 -4.137,35.672 v1(-4.137,38.44)
  Bottom Layer w0.102: R12.2@-4.529,15.939 -4.529,16.073 -4.153,16.449 v1(-4.153,16.525) v1@-4.105,16.477 ; R12.2@-4.462,15.872 -4.134,15.544 -2.937,15.544 U4.1@-2.937,15.323
GPIO5: U1.34 U7.20 | length 18.3
  Top Layer w0.102: U1.34@1.7,37.611 1.7,36.782 1.855,36.627 1.855,34.887 2.292,34.45 4.262,34.45 4.635,34.078 4.635,33.994 v1(4.603,33.963) ; U7.20@3.78,25.5 3.78,24.57 v1(4.241,24.109)
  Layer 2 w0.102: v1(4.241,24.109) 4.226,24.109 3.885,24.45 3.885,25.75 4.582,26.447 4.582,28.752 4.568,28.766 4.568,30.085 4.127,30.526 4.127,33.487 v1(4.603,33.963)
GPIO12: J2.9 U1.18 | length 26.9
  Top Layer w0.102: v1@-4.72,42.44 -4.72,41.956 -4.445,41.681 -4.445,41.228 -4.127,40.911 -3.409,40.911 -3.338,40.84 U1.18@-2.704,40.84
  Layer 2 w0.102: v1(-4.796,42.44) -4.796,41.769 -2.628,39.601 -2.628,38.13 -2.347,37.849 0.294,37.849 1.888,36.255 1.888,34.779 0.569,33.46 0.569,28.192 -0.079,27.544 -0.109,27.544 -0.132,27.521 -0.496,27.521 v1(-0.851,27.876)
  Bottom Layer w0.102: J2.9@-1.4,30.4 -1.4,28.6 -1.102,28.302 -1.102,28.128 v1(-0.851,27.876)
GPIO13: J2.7 U1.20 | length 21.8
  Top Layer w0.102: v1(-4.27,39.982) -4.212,40.04 U1.20@-2.704,40.04
  Layer 2 w0.102: v1(-4.27,39.982) -3.296,39.982 -2.831,39.517 -2.831,38.046 -2.431,37.646 0.21,37.646 1.685,36.17 1.685,34.863 0.366,33.544 0.366,28.344 0.186,28.164 0.008,28.164 v1(-0.279,27.877)
  Bottom Layer w0.102: v1(-0.279,27.877) 0,28.156 J2.7@0,30.4
GPIO14: J2.10 U1.17 | length 28.6
  Top Layer w0.102: v1(-4.445,42.961) -4.387,42.902 -4.387,42.259 -4.399,42.247 -4.399,41.941 -4.22,41.762 -4.22,41.29 -4.043,41.114 -3.409,41.114 -3.294,41.229 -2.715,41.229 U1.17@-2.704,41.24
  Layer 2 w0.102: v1(-4.445,42.961) -4.44,42.956 -4.44,41.908 -2.425,39.892 -2.425,38.214 -2.262,38.052 0.378,38.052 2.091,36.339 2.091,34.679 0.772,33.36 0.772,28.108 -0.018,27.318 -0.795,27.318 -1.408,27.93 v1@-1.499,27.93
  Bottom Layer w0.102: J2.10@-2.1,30.4 -2.1,28.6 -1.839,28.339 -1.839,28.222 -1.744,28.222 -1.581,28.059 v1(-1.499,28.059)
GPIO15: J2.11 R33.1 U1.21 | length 25.8
  Top Layer w0.102: v1@-3.447,39.618 -2.726,39.618 U1.21@-2.704,39.64 ; v1(-2.158,27.866) -2.158,28.609 -1.857,28.91 -0.744,28.91 0.813,30.468 R33.1@1.866,30.468
  Layer 2 w0.102: v1(-3.447,39.494) -3.034,39.082 -3.034,37.962 -2.515,37.443 0.125,37.443 1.409,36.159 1.409,34.874 0.163,33.628 0.163,32.603 -0.691,31.749 -0.691,30.959 -1.643,30.006 -1.643,28.417 -2.158,27.903 v1(-2.158,27.866)
  Bottom Layer w0.102: J2.11@-2.8,30.4 -2.8,28.507 v1(-2.158,27.866)
GPIO16: R2.1 U1.25 U2.1 | length 4.9
  Top Layer w0.102: R2.1@-4.248,37.516 -4.971,37.516 -5.182,37.306 -5.182,37.27 -4.758,36.847 -2.496,36.847 -1.9,37.443 U1.25@-1.9,37.611
GPIO17: R7.1 U1.27 | length 6.8
  Top Layer w0.102: R7.1@-2.553,31.442 -2.104,31.891 -2.104,34.814 -1.165,35.753 -1.165,37.208 -1.1,37.273 U1.27@-1.1,37.611
GPIO18: U1.35 U7.16 | length 23
  Top Layer w0.102: U7.16@1.78,25.5 1.78,23.493 2.321,22.953 v1(2.321,22.062) ; U1.35@2.1,37.611 2.058,37.568 2.058,34.971 2.376,34.653 4.556,34.653 v1(4.603,34.701)
  Layer 2 w0.102: v1(2.321,22.062) 2.321,24.472 4.379,26.531 4.379,28.668 4.365,28.682 4.365,30.001 3.924,30.441 3.924,34.022 v1(4.603,34.701)
GPIO19: U1.38 U7.12 | length 24.6
  Top Layer w0.102: U7.12@-0.22,25.5 -0.184,25.464 -0.184,22.852 0.649,22.019 v1(1.756,22.019) ; U1.38@3.279,38.84 3.915,38.84 4.362,38.393 4.362,37.724 4.166,37.528 4.166,37.058 4.602,36.621 v1(4.602,35.413)
  Layer 2 w0.102: v1(1.756,22.019) 1.698,22.078 1.698,22.346 1.604,22.44 1.604,24.331 3.973,26.699 3.973,28.5 3.959,28.513 3.959,29.832 3.518,30.273 3.518,34.411 4.52,35.413 v1(4.602,35.413)
GPIO21: D8.1 R4.2 S3.1 U1.42 | length 33.4
  Top Layer w0.102: U1.42@3.279,40.44 4.349,40.44 4.603,40.186 4.603,39.516 5.207,38.913 5.207,38.602 5.552,38.257 5.552,37.913 5.814,37.652 6.545,37.652 R4.2@6.684,37.79 6.684,36.684 D8.1@6.67,36.671 6.67,36.621 7.149,36.142 7.149,35.738 7.349,35.538 v1(7.349,35.5)
  Layer 2 w0.102: v1(2.841,18.765) 2.804,18.801 2.841,18.801 6.213,18.801 6.516,19.105 7.959,19.105 8.382,19.528 8.382,19.822 8.174,20.03 7.317,20.03 6.005,21.342 6.005,30.66 5.566,31.099 5.566,32.441 6.274,33.149 6.274,34.053 6.909,34.688 6.909,35.06 v1(7.349,35.5)
  Bottom Layer w0.102: S3.1@2.075,18 2.075,18.089 2.499,18.513 2.589,18.513 v1(2.841,18.765)
GPIO22: U1.39 U7.7 | length 23.6
  Top Layer w0.102: U7.7@-2.72,25.5 -2.707,25.512 v1@-2.707,26.568 ; U1.39@3.279,39.24 3.328,39.191 3.851,39.191 4.581,38.461 4.581,37.956 4.577,37.953 4.577,37.652 4.369,37.443 4.369,37.142 4.807,36.705 4.807,35.749 v1(5.131,35.425)
  Layer 2 w0.102: v1(-2.73,26.568) -2.261,26.098 3.085,26.098 3.769,26.783 3.769,28.415 3.755,28.429 3.755,29.748 3.315,30.189 3.315,34.628 4.455,35.768 4.787,35.768 v1(5.131,35.425)
GPIO23: R32.1 U1.36 U7.5 | length 29.4
  Top Layer w0.102: U7.5@-3.72,25.5 -3.695,25.525 -3.695,27.158 v1(-3.67,27.183) -3.074,27.183 -2.777,27.481 -2.777,28.278 -1.906,29.149 -0.793,29.149 1.646,31.587 1.853,31.587 R32.1@1.882,31.616 ; U1.36@2.455,37.565 U1.36@2.5,37.611 2.5,37.319 2.549,37.27 2.843,37.27 v1(3.111,37.538)
  Layer 2 w0.102: v1(-3.67,27.183) -2.842,27.183 -2.357,26.698 -2.294,26.698 -1.898,26.302 3,26.302 3.566,26.867 3.566,28.331 3.552,28.345 3.552,29.664 3.111,30.105 3.111,35.595 3.209,35.692 3.209,36.548 3.111,36.646 v1(3.111,37.538)
GPIO25: R14.2 U1.14 U7.3 | length 37.2
  Top Layer w0.102: U7.3@-4.72,25.5 v1(-4.72,27.545) ; v1(-3.67,44.022) -3.67,43.181 -3.409,42.92 -3.409,42.792 -3.205,42.588 -3.189,42.588 -3.041,42.44 U1.14@-2.704,42.44
  Layer 2 w0.102: v1(-4.72,27.545) -4.088,28.176 -3.547,28.176 -2.474,27.104 -2.412,27.104 -1.814,26.505 2.916,26.505 3.363,26.952 3.363,28.247 3.349,28.261 3.349,29.58 2.908,30.021 2.908,35.679 3.006,35.777 3.006,36.463 1.011,38.459 -1.643,38.459 -2.018,38.834 -2.018,40.456 -3.484,41.922 -3.484,42.838 -3.67,43.024 v1(-3.67,44.022)
  Bottom Layer w0.102: R14.2@-6.681,27.068 -5.196,27.068 v1(-4.72,27.545)